# Altium PCB PCB1.PcbDoc
Units mil, origin at the board's own origin, x right, y up, seen from the top; angles counter-clockwise.
Board outline 6000 x 4000 mil, 2 copper layers (Top Layer, Bottom Layer); 15 components, 21 nets, 96 pads, 0 vias.
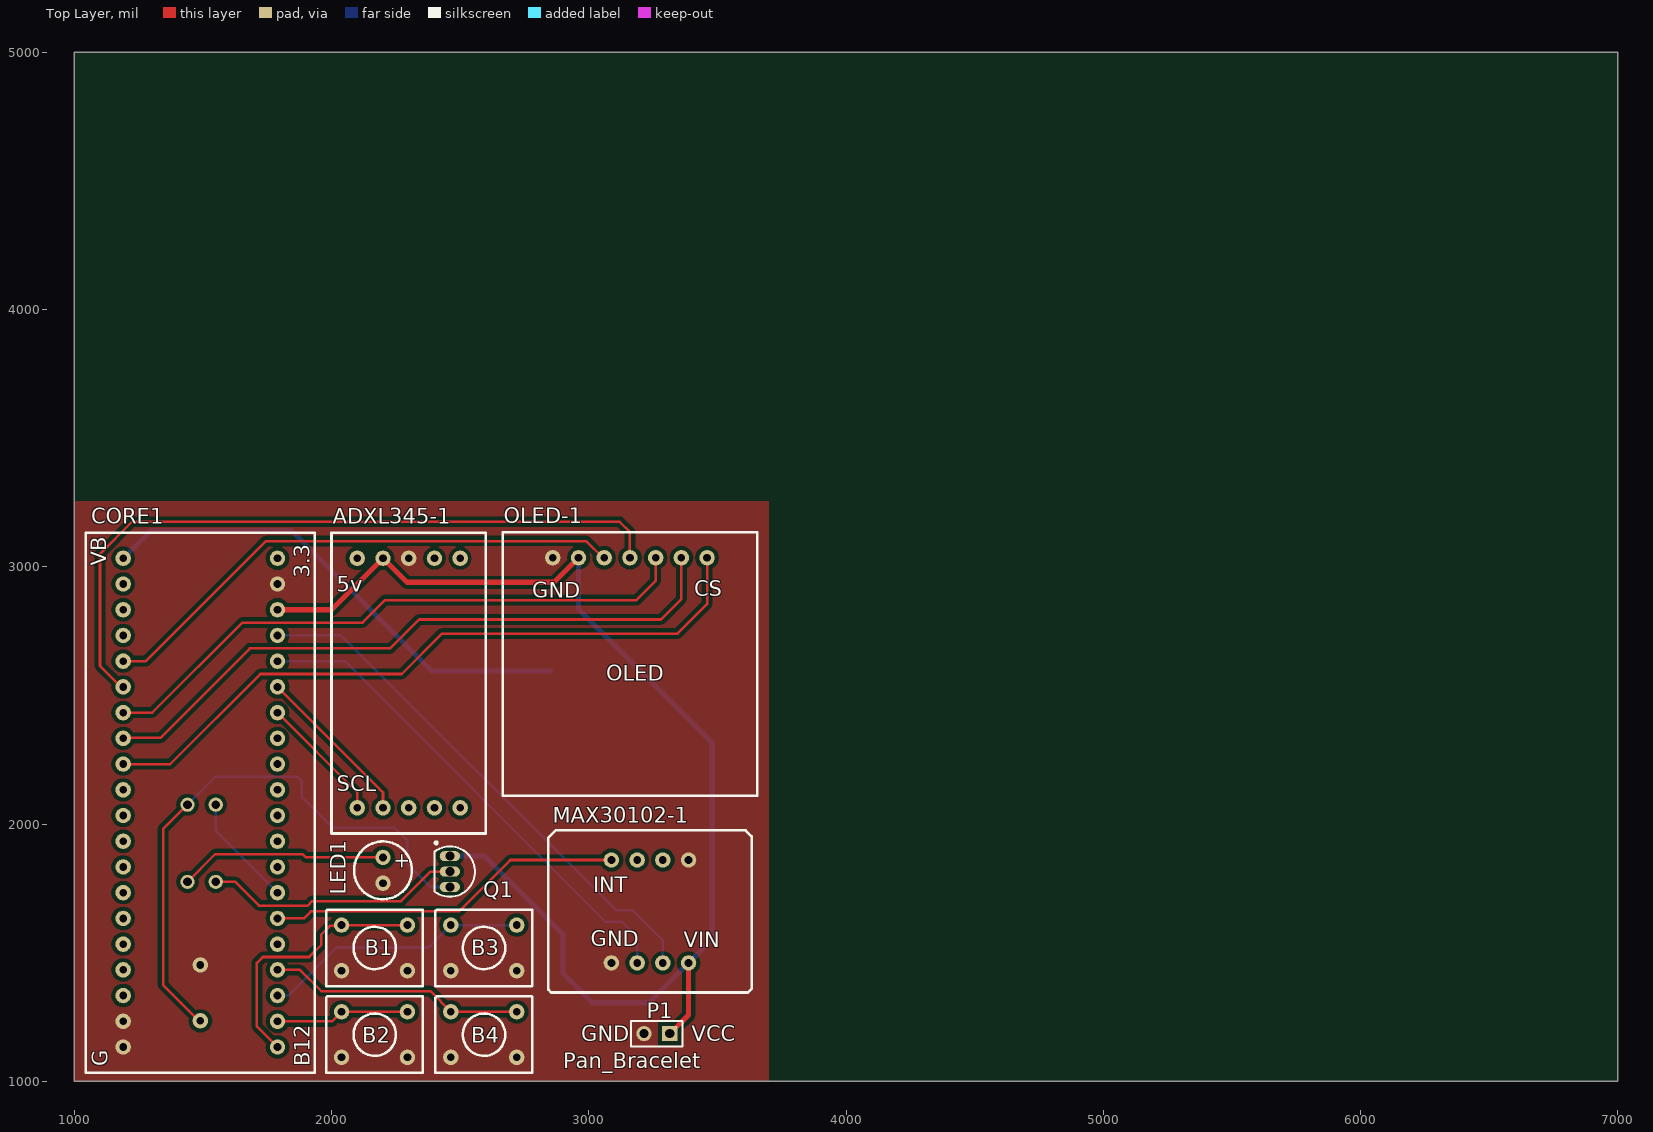
[diagram p0: Top Layer view]
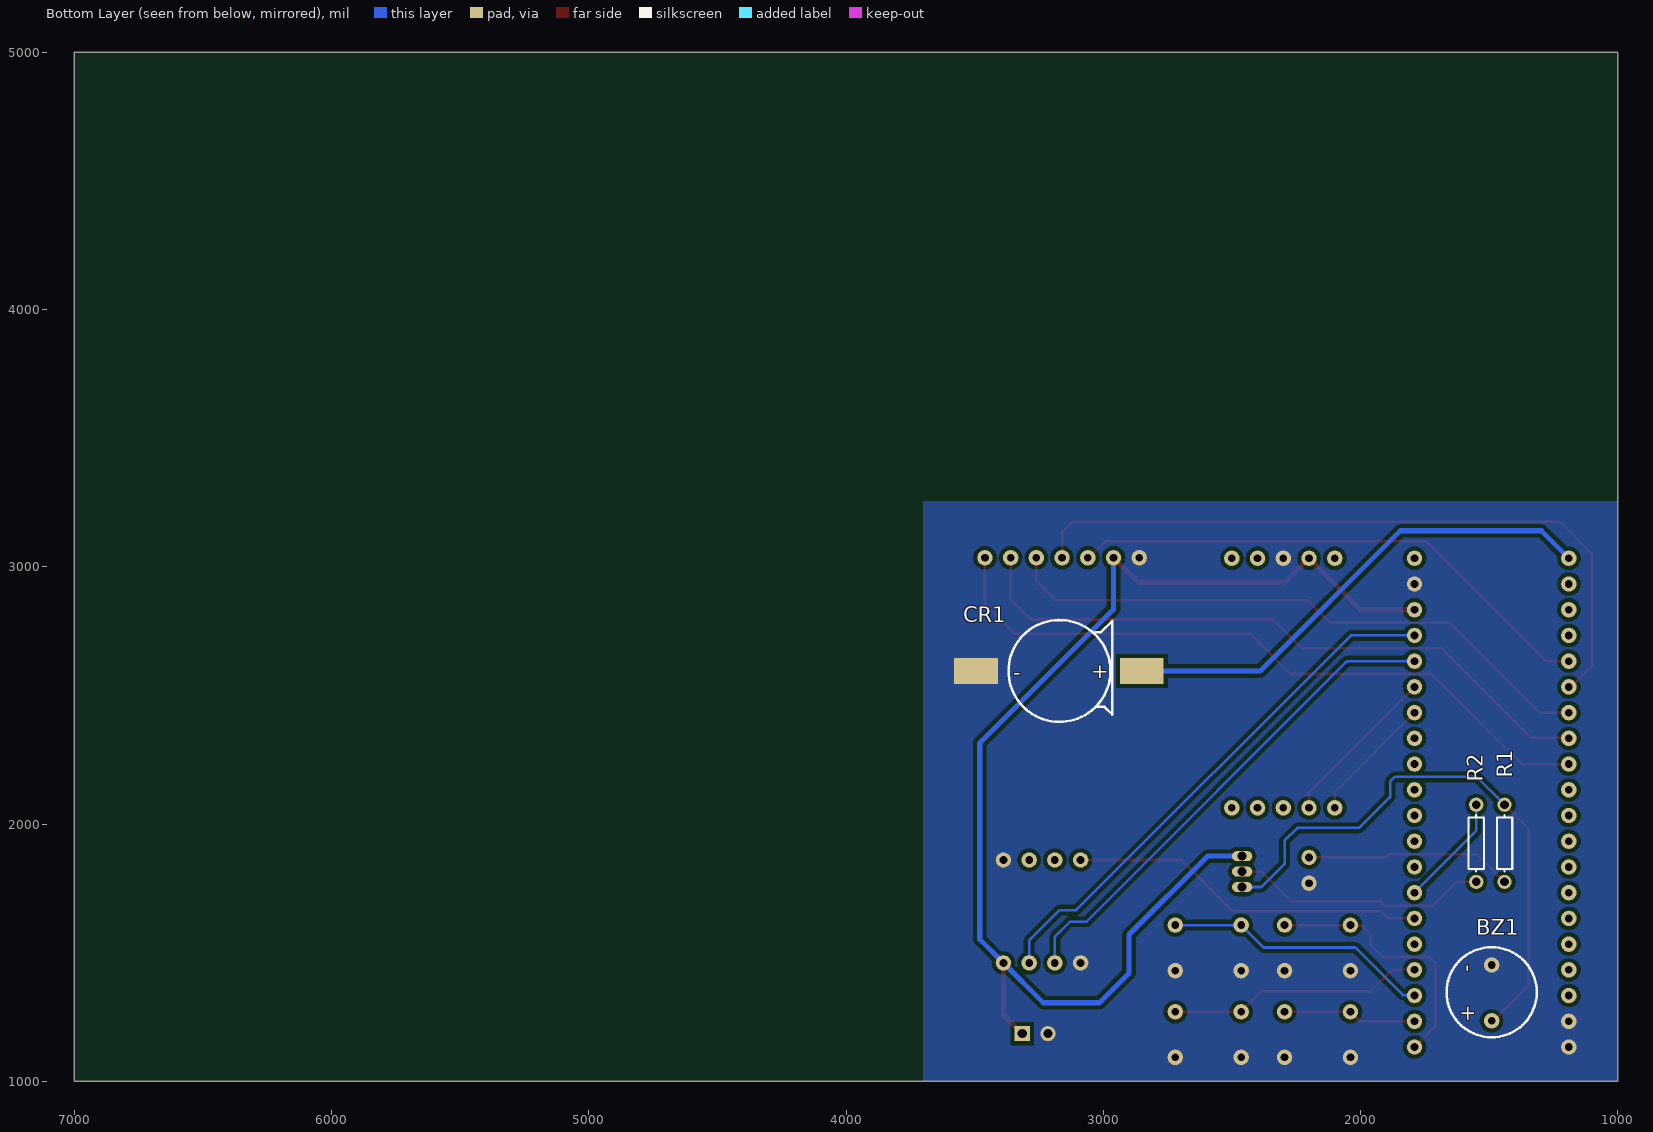
[diagram p1: Bottom Layer view, seen from below]

## Layer stack, top to bottom
Top Solder: solder mask 0.4, Solder Resist, Dk 3.5
Top Layer: signal copper 1.4
Dielectric 1: dielectric 12.6, FR-4, Dk 4.8
Bottom Layer: signal copper 1.4
Bottom Solder: solder mask 0.4, Solder Resist, Dk 3.5

## Board outline
1000,1000 7000,1000 7000,5000 1000,5000

## Design rules (kind name [scope] priority, off if disabled: settings)
Clearance [All] p1: gap=15 ignorepadtopadclearanceinfootprint=TRUE
PolygonConnect [All] p1: connectstyle=Direct reliefconductorwidth=10 reliefentries=4 polygonreliefangle="90 Angle" airgapwidth=10
RoutingVias [All] p1: holewidth=28 width=50 viastyle="Through Hole" minholewidth=28 minwidth=50 maxholewidth=28 maxwidth=50
SolderMaskExpansion [All] p1: expansion=4
UnRoutedNet [All] p1: checkbadconnections=TRUE
Width Width_VB [InNet('VB')] p1: maxlimit=20 minlimit=20 preferedwidth=20 minimp=50.000000 maximp=50.000000 favimp=50.000000
Width Width_VCC [InNet('VCC')] p2: maxlimit=20 minlimit=20 preferedwidth=20 minimp=50.000000 maximp=50.000000 favimp=50.000000
Width Width_GND [InNet('GND')] p3: maxlimit=30 minlimit=30 preferedwidth=30 minimp=50.000000 maximp=50.000000 favimp=50.000000
Width Width_Signal [All] p4: maxlimit=10 minlimit=10 preferedwidth=10
29 further rules are at their usual default settings.

## Components (designator, comment, footprint, x,y, rotation, side; value= is the part's Value field where it differs from the comment)
ADXL345-1 "ADXL345" ADXL345 2695,2933 r0 top
B1 "Button" Button 2094,1607 r0 top
B2 "Button" Button 2094,1270 r0 top
B3 "Button" Button 2519,1607 r0 top
B4 "Button" Button 2519,1270 r0 top
BZ1 "Buzzer" Buzzer 1490,1375 r90 bottom
CORE1 "STM32F03C8T6" STM32F103C8T6 1300,1803 r90 top
CR1 "CR1220 Battery" "CR1220 Battery" 3295,2595 r180 bottom
LED1 "LED" LED 2200,1800 r270 top
MAX30102-1 "MAX30102" MAX30102 3385,1790 r0 top
OLED-1 "12864OLED" OLED 3165,2955 r0 top
P1 "Header 2" HDR1X2 3315,1185 r180 top
Q1 "2N3906" TO-92A 2460,1815 r180 top
R1 "Res1" AXIAL-0.3 1440,1925 r270 bottom value=1K
R2 "Res1" AXIAL-0.3 1550,1925 r90 bottom value=1K

## Footprints (in the part's own frame and the unit in brackets; to place one, negate y for a bottom-side part, rotate by r counter-clockwise, add the part's x,y. Pads: shape width x height; smd on the part's side, far side on the other; paste and mask are expansions set on the pad)
ADXL345 [mil]
  round 60 hole 30: 1(-595,100) 2(-495,100) 3(-395,100) 4(-295,100) 5(-195,100) 6(-195,-870) 7(-295,-870) 8(-395,-870) 9(-495,-870) 10(-595,-870)
  silkscreen extent -695,-970 -95,200
AXIAL-0.3 [mm] "Axial Device, Thru-Hole; 2 Leads; 0.3 in Pin Spacing"
  round 1.4 hole 0.85: 1(-3.81,0) 2(3.81,0)
  silkscreen extent -2.77,-0.76 2.77,0.76
Button [mil]
  round 60 hole 30: 1(-55,0) 2(201,0) 3(201,-177) 4(-55,-177)
  silkscreen extent -115,-237 261,60
Buzzer [mil]
  round 60 hole 30: 1(-140,0) 2(77,0)
  silkscreen extent -204,-175 146,175
"CR1220 Battery" [mil]
  rect 170x100 smd: 1(-200,0) 2(445,0)
  silkscreen extent -73,-198 330,198
HDR1X2 [mm] "Connector; Header; 2 Position"
  rect 1.5x1.5 hole 0.9: 1(0,0)
  round 1.5 hole 0.9: 2(2.54,0)
  silkscreen extent -1.27,-1.27 3.81,1.27
LED [mil]
  round 60 hole 30: 1(-70,0) 2(30,0)
  silkscreen extent -132,-112 92,112
MAX30102 [mil]
  round 60 hole 30: 1(-297,70) 2(-197,70) 3(-97,70) 4(3,70) 5(3,-330) 6(-97,-330) 7(-197,-330) 8(-297,-330)
  silkscreen extent -542,-445 248,185
OLED [mil]
  round 60 hole 30: 1(-305,80) 2(-205,80) 3(-105,80) 4(-5,80) 5(95,80) 6(195,80) 7(295,80)
  silkscreen extent -500,-845 490,180
STM32F103C8T6 [mil]
  round 60 hole 30: 1(-670,-490) 2(-570,-490) 3(-470,-490) 4(-370,-490) 5(-270,-490) 6(-170,-490) 7(-70,-490) 8(30,-490) 9(130,-490) 10(230,-490) 11(330,-490) 12(430,-490) 13(530,-490) 14(630,-490) 15(730,-490) 16(830,-490) 17(930,-490) 18(1030,-490) 19(1130,-490) 20(1230,-490) 21(1230,110) 22(1130,110) 23(1030,110) 24(930,110) 25(830,110) 26(730,110) 27(630,110) 28(530,110) 29(430,110) 30(330,110) 31(230,110) 32(130,110) 33(30,110) 34(-70,110) 35(-170,110) 36(-270,110) 37(-370,110) 38(-470,110) 39(-570,110) 40(-670,110)
  silkscreen extent -770,-635 1330,255
TO-92A [mm] "TO, Flat Index; 3 In-Line, Axial Leads; Body Dia. 4.5mm; Leads 0.51 x 0.48 mm (max)"
  oval 2x1 hole 0.9: 1(0,-1.524) 2(0,0) 3(0,1.524)
  silkscreen extent -2.48,-2.95 1.5,2.48, body extent -2.48,-2.5 1.5,2.5, height 6.86

## Part data
P1: "Header, 2-Pin", LatestRevisionDate=17-Jul-2002, LatestRevisionNote="Re-released for DXP Platform.", Publisher="Altium Limited"
Q1: "PNP General Purpose Amplifier", ComponentLink1Description="Manufacturer Link", ComponentLink1URL=http://www.fairchildsemi.com/, ComponentLink2Description=Datasheet, ComponentLink2URL=http://www.fairchildsemi.com/ds/2N%2F2N3906.pdf, DatasheetVersion=1997, LatestRevisionDate=15-Jan-2003, LatestRevisionNote="PCB Footprint 'BCY-W3/D4.7' replaced", PackageDescription="TO, Flat Index; 3 In-Line, Axial Leads; Body Dia. 4.5mm; Leads 0.51 x 0.48 mm (max)", PackageReference=TO-92A, PackageVersion=Sep-1998, Published=8-Jun-2000, Publisher="Altium Limited"
R1 R2: "Resistor", LatestRevisionDate=17-Jul-2002, LatestRevisionNote="Re-released for DXP Platform.", PackageDescription="Axial Device, Thru-Hole; 2 Leads; 0.3 in Pin Spacing", PackageReference=AXIAL-0.3, Published=8-Jun-2000, Publisher="Altium Limited"

## Nets (pads, with @x,y where several pads share a name; then routed paths per layer and width w, separated by ;. In a path a pad name is that pad's centre, name@x,y a point inside that pad or via, vN(x,y) a via of type N, cw(c..) or ccw(c..) an arc to the next point about the centre after c; other vN are vias at no path point)
GND: ADXL345-1.3 B1.3 B1.4 B2.3 B2.4 B3.3 B3.4 B4.3 B4.4 BZ1.2 CORE1.19 CORE1.39 CORE1.40 CR1.1 LED1.2 MAX30102-1.4 MAX30102-1.8 OLED-1.1 P1.2
NetBZ1_1: BZ1.1 Q1.3 R1.1 | length 2272.2
  Top Layer w10: R1.1 1345,1980 1345,1375 1485,1235 BZ1.1
  Bottom Layer w10: R1.1 1548,2183 1867,2183 1885,2165 1885,2105 2005,1985 2245,1985 2295,1935 2295,1845 2385,1755 Q1.3
NetLED1_1: LED1.1 R1.2 | length 810.1
  Top Layer w10: R1.2 1548,1883 1887,1883 1900,1870 LED1.1
NetQ1_2: Q1.2 R2.1 | length 1002.8
  Top Layer w10: R2.1 1626.1,1775 1718.1,1683 1907.64,1683 1924.64,1700 2270,1700 2385,1815 Q1.2
PA0: CORE1.25 OLED-1.3 | length 2100.4
  Top Layer w10: CORE1.25 1278,2633 1745,3100 2990,3100 3055,3035 OLED-1.3 OLED-1.3@3060,3045
PA1: CORE1.26 OLED-1.4 | length 2787.3
  Top Layer w10: CORE1.26 1182,2533 1100,2615 1100,3050 1225,3175 3120,3175 3160,3135 OLED-1.4
PA2: CORE1.27 OLED-1.5 | length 2372.1
  Top Layer w10: CORE1.27 1303,2433 1653,2783 2120.5,2783 2207.5,2870 3185,2870 3260,2945 OLED-1.5
PA3: CORE1.28 OLED-1.6 | length 2554.5
  Top Layer w10: CORE1.28 1192,2335 1335,2335 1683,2683 2228,2683 2340,2795 3280,2795 3360,2875 OLED-1.6
PA4: CORE1.29 OLED-1.7 | length 2707.6
  Top Layer w10: CORE1.29 1373,2233 1723,2583 2273,2583 2430,2740 3345,2740 3460,2855 OLED-1.7
PA9: CORE1.6 MAX30102-1.1 | length 1392
  Top Layer w10: CORE1.6 1893,1633 1920,1660 2495,1660 2695,1860 MAX30102-1.1
PA10: CORE1.7 R2.2 | length 441.4
  Bottom Layer w10: R2.2 1550,1973 CORE1.7
PB6: ADXL345-1.10 CORE1.14 | length 498.4
  Top Layer w10: CORE1.14 2100,2123 ADXL345-1.10
PB7: ADXL345-1.9 CORE1.15 | length 641.8
  Top Layer w10: CORE1.15@1792,2533 CORE1.15 2200,2123 ADXL345-1.9
PB8: CORE1.16 MAX30102-1.7 | length 1943.6
  Bottom Layer w10: CORE1.16 2052,2633 3065,1620 3130,1620 3188,1562 MAX30102-1.7
PB9: CORE1.17 MAX30102-1.6 | length 2076.3
  Bottom Layer w10: CORE1.17 2037,2733 3105,1665 3170,1665 3288,1547 MAX30102-1.6
PB12: B1.1 B1.2 CORE1.1 | length 1029.5
  Top Layer w10: CORE1.1 1710,1213 1710,1460 1733,1483 1913,1483 1960,1530 1960,1570 1994,1604 2036,1604 B1.1 B1.2
PB13: B2.1 B2.2 CORE1.2 | length 520.3
  Top Layer w10: CORE1.2 2002,1233 B2.1 B2.2
PB14: B3.1 B3.2 CORE1.3 | length 1043.5
  Bottom Layer w10: CORE1.3 1792,1335 1835,1335 2020,1520 2377,1520 B3.1 B3.2
PB15: B4.1 B4.2 CORE1.4 | length 997.5
  Top Layer w10: CORE1.4 1877,1433 1960,1350 2384,1350 B4.1 B4.2
VB: CORE1.21 CR1.2 | length 1930.1
  Bottom Layer w20: CORE1.21 1297,3140 1845,3140 2390,2595 CR1.2
VCC: ADXL345-1.2 CORE1.18 MAX30102-1.5 OLED-1.2 P1.1 Q1.1 | length 4780.6
  Top Layer w20: CORE1.18 2000,2833 ADXL345-1.2 2293,2940 2865,2940 OLED-1.2 ; P1.1 3388,1258 MAX30102-1.5
  Bottom Layer w20: Q1.1 2595,1875 2900,1570 2900,1420 3015,1305 3233,1305 MAX30102-1.5 3480,1552 3480,2315 2960,2835 OLED-1.2
pads on no net: ADXL345-1.1 ADXL345-1.4 ADXL345-1.5 ADXL345-1.6 ADXL345-1.7 ADXL345-1.8 CORE1.5 CORE1.8 CORE1.9 CORE1.10 CORE1.11 CORE1.12 CORE1.13 CORE1.20 CORE1.22 CORE1.23 CORE1.24 CORE1.30 CORE1.31 CORE1.32 CORE1.33 CORE1.34 CORE1.35 CORE1.36 CORE1.37 CORE1.38 MAX30102-1.2 MAX30102-1.3

## Polygon pours and split planes (outlines as drawn)
GND on Bottom Layer "Bottom Layer-GND" (solid, remove dead copper, pour order 52): 1000,3255 1000,1000 3700,1000 3700,3255
GND on Bottom Layer "Bottom Layer-GND 1" (solid, remove dead copper, pour order 38): 485,1420
GND on Top Layer "Top Layer-GND" (solid, remove dead copper, pour order 50): 1000,3255 1000,1000 3700,1000 3700,3255

## Silkscreen, mask and mechanical layers (free items; w line width, h text height)
Top Overlay:
  text "GND" at 2970,1155 h60
  text "VCC" at 3400,1155 h60
  text "Pan_Bracelet" at 2900,1050 h60
Mechanical 1:
  lines w10: 1000,1000 1000,3255 3700,3255 3700,1000 1000,1000
Drill Drawing:
  lines w10: 1000,1000 3700,1000 3700,3255 1000,3255 1000,1000

## Text inside footprints (layer, text, board x,y; h text height)
ADXL345-1: Top Overlay "SCL" at 2020,2128 h60; Top Overlay "5v" at 2020,2903 h60
BZ1: Bottom Overlay "+" at 1558,1229 h60 r270; Bottom Overlay "-" at 1562,1424 h60 r270
CORE1: Top Overlay "3.3" at 1915,2958 h60 r90; Top Overlay "VB" at 1125,3003 h60 r90; Top Overlay "B12" at 1915,1058 h60 r90; Top Overlay "G" at 1130,1058 h60 r90
CR1: Bottom Overlay "-" at 3350,2561 h60; Bottom Overlay "+" at 3046,2566 h60
LED1: Top Overlay "+" at 2250,1890 h60 r270
MAX30102-1: Top Overlay "VIN" at 3370,1520 h60; Top Overlay "GND" at 3008,1525 h60; Top Overlay "INT" at 3017,1735 h60
OLED-1: Top Overlay "OLED" at 3067,2557 h60; Top Overlay "GND" at 2780,2880 h60; Top Overlay "CS" at 3410,2885 h60